# EAGLE board substep_motor_driver (EAGLE 6.5.0)
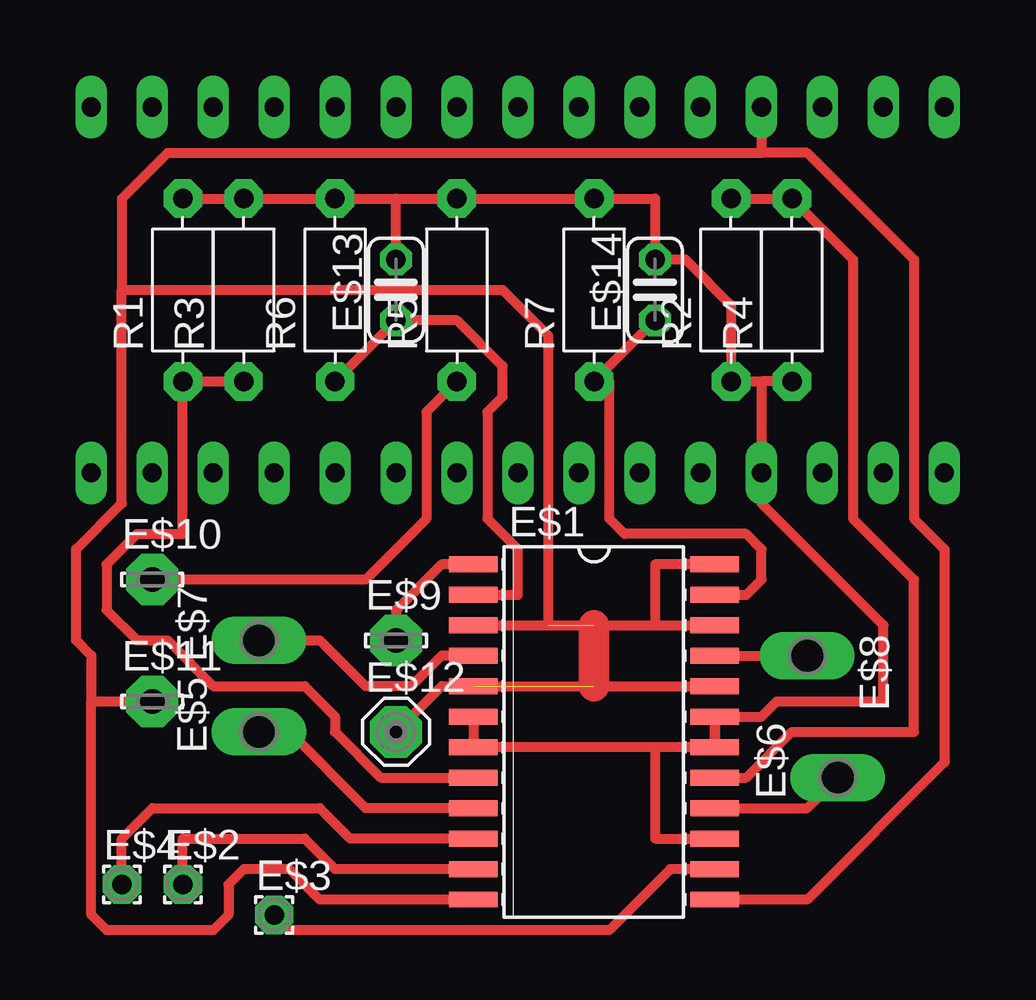
[diagram p0: board, top side]
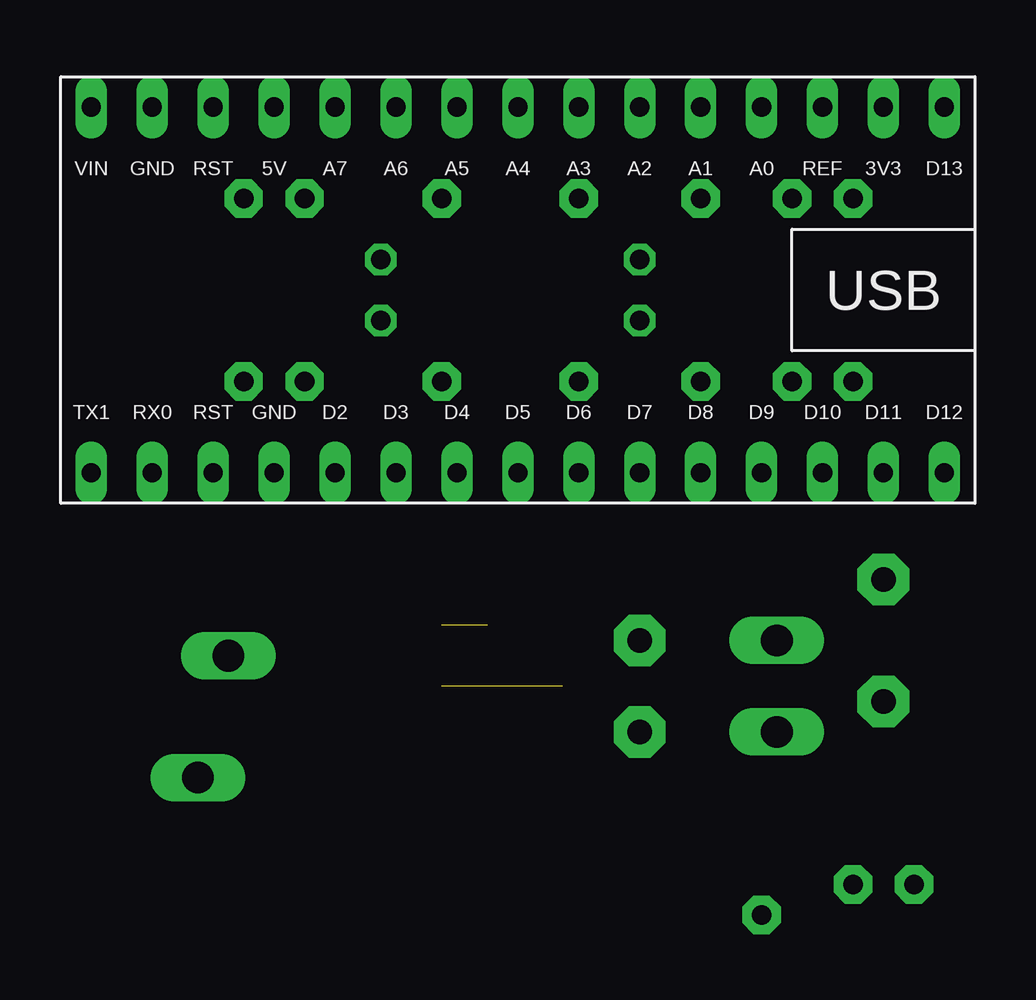
[diagram p1: board, bottom side, seen from below]

No outline drawn. Coordinates in mm, seen from the top.
Copper layers (1*16): Top 0.035mm / dielectric 1.5mm / Bottom 0.035mm
Design rules "default": minimum track width 10mil, minimum drill 24mil, track to track 8mil, track to pad 8mil, pad to pad 8mil, via to via 8mil, smd to smd 8mil, copper to edge 40mil, drill to drill 8mil, minimum pad ring 10mil, minimum via ring 8mil, stop-mask expansion 4mil, vias tented up to drill 0mil, thermal gap 10mil

## Footprints (pad centres in the part's own frame; a part is rotated, then mirrored left to right if it is on the bottom)
SO24R = smd 0.66 x 2.032: 1 -6.985,-5.029; 2 -5.715,-5.029; 3 -4.445,-5.029; 4 -3.175,-5.029; 5 -1.905,-5.029; 6 -0.635,-5.029; 7 0.635,-5.029; 8 1.905,-5.029; 9 3.175,-5.029; 10 4.445,-5.029; 11 5.715,-5.029; 12 6.985,-5.029; 13 6.985,5.029; 14 5.715,5.029; 15 4.445,5.029; 16 3.175,5.029; 17 1.905,5.029; 18 0.635,5.029; 19 -0.635,5.029; 20 -1.905,5.029; 21 -3.175,5.029; 22 -4.445,5.029; 23 -5.715,5.029; 24 -6.985,5.029
1,6/0,8 = drill 0.813 pad 1.6 octagon: 1 0,0
P1-13Y = drill 1.321 pad 1.905 long: TP 0,0
LSP10 = drill 1.016 pad 2.159 octagon: MP 0,0
MCS10B = drill 1.016 pad 2.159 octagon: MP 0,0
C025-024X044 = drill 0.813 octagon: 1 -1.27,0; 2 1.27,0
ARDUINO_NANO = drill 0.8 long: P$1 0,7.62; P$2 -2.54,7.62; P$3 -5.08,7.62; P$4 -7.62,7.62; P$5 -10.16,7.62; P$6 -12.7,7.62; P$7 -15.24,7.62; P$8 -17.78,7.62; P$9 2.54,7.62; P$10 5.08,7.62; P$11 7.62,7.62; P$12 10.16,7.62; P$13 12.7,7.62; P$14 15.24,7.62; P$15 17.78,7.62; P$16 -17.78,-7.62; P$17 -15.24,-7.62; P$18 -12.7,-7.62; P$19 -10.16,-7.62; P$20 -7.62,-7.62; P$21 -5.08,-7.62; P$22 -2.54,-7.62; P$23 0,-7.62; P$24 2.54,-7.62; P$25 5.08,-7.62; P$26 7.62,-7.62; P$27 10.16,-7.62; P$28 12.7,-7.62; P$29 15.24,-7.62; P$30 17.78,-7.62
R-7,5 = drill 0.813 pad 1.6 octagon: 1 -3.81,0; 2 3.81,0

## Placement (x,y rotation side)
E$1  [SO24R]  22.23,8.89 270 top
E$2  [1,6/0,8]  5.08,2.54 0 top
E$3  [1,6/0,8]  8.89,1.27 0 top
E$4  [1,6/0,8]  2.54,2.54 0 top
E$5  [P1-13Y]  8.26,8.89 90 top
E$6  [P1-13Y]  32.38,6.99 90 top
E$7  [P1-13Y]  8.26,12.7 90 top
E$8  [P1-13Y]  31.11,12.06 270 top
E$9  [LSP10]  13.97,12.7 0 top
E$10  [LSP10]  3.81,15.24 0 top
E$11  [LSP10]  3.81,10.16 0 top
E$12  [MCS10B]  13.97,8.89 0 top
E$13  [C025-024X044]  13.97,27.3 90 top
E$14  [C025-024X044]  24.77,27.3 90 top
E$15  [ARDUINO_NANO]  19.05,27.3 180 bottom
R1  1.2  [R-7,5]  5.08,27.3 90 top
R2  1.2  [R-7,5]  27.94,27.3 90 top
R3  1.2  [R-7,5]  7.62,27.3 90 top
R4  1.2  [R-7,5]  30.48,27.3 90 top
R5  1.2  [R-7,5]  16.51,27.3 90 top
R6  1.2  [R-7,5]  11.43,27.3 90 top
R7  1.2  [R-7,5]  22.23,27.3 90 top

## Library data of the parts
E$1 = analog-devices
E$2-E$4 = wirepad
E$5-E$8 = testpad
E$9-E$12 = solpad
E$13 E$14 = rcl
E$15 = eagle_llibrary
R1-R7 = discrete

## Nets
S$1: E$1.3 E$1.5 E$1.12 E$1.13 E$1.20 E$1.22 E$1.24 E$11.MP E$12.MP
S$2: E$1.10 E$4.1
S$3: E$1.1 E$9.MP
S$5: E$1.6 E$1.7 E$1.15 E$1.18 E$1.19 E$13.2 E$14.2 R1.2 R2.1 R3.2 R4.1 R5.2 R6.2 R7.2
S$6: E$1.8 R1.1 R3.1
S$7: E$1.17 R2.2 R4.2
S$8: E$1.11 E$2.1
S$9: E$1.9 E$5.TP
S$10: E$1.16 E$6.TP
S$11: E$1.4 E$7.TP
S$12: E$1.21 E$8.TP
S$13: E$1.2 E$13.1 R6.1
S$14: E$1.23 E$14.1 R7.1
S$15: E$10.MP R5.1
S$17: E$1.14 E$3.1

## Tracks (layer width: path | path; a pad name or v marks a point on that pad's centre or on a via)
S$1  (2 unrouted)
  Top 0.406: E$1.13 31.11,1.91 36.83,7.62 36.83,16.51 35.56,17.78 35.56,28.57 31.11,33.02 29.21,33.02 | 29.21,34.92 29.21,33.02 | 29.21,33.02 4.45,33.02 2.54,31.11 2.54,27.3 | 2.54,27.3 18.41,27.3 20.32,25.4 20.32,13.34 | 2.54,27.3 2.54,18.41 0.64,16.51 0.64,12.7 1.27,12.06 1.27,10.16 | 1.27,10.16 E$11.MP | E$1.12 10.79,1.91 9.53,3.17 7.62,3.17 6.99,2.54 6.99,1.27 6.35,0.64 1.91,0.64 1.27,1.27 1.27,10.16 | E$1.24 24.77,15.88 24.77,13.34 | 24.77,13.34 E$1.22 | E$1.3 20.32,13.34 | 20.32,13.34 22.23,13.34 24.77,13.34 | E$12.MP 15.88,10.79 E$1.5 22.23,10.79 E$1.20
  Top 1.27: 22.23,13.34 22.23,10.79
S$2
  Top 0.406: E$1.10 12.06,4.45 10.79,5.71 3.81,5.71 2.54,4.45 E$4.1
S$3
  Top 0.406: E$1.1 15.88,15.88 13.97,13.97 E$9.MP
S$5
  Top 0.406: E$1.6 E$1.7 24.77,8.26 | 24.77,8.26 24.77,4.45 E$1.15 | 10.79,31.11 R6.2 | R6.2 13.97,31.11 | E$13.2 13.97,31.11 | 13.97,31.11 R5.2 R7.2 24.77,31.11 E$14.2 26.04,28.57 27.94,26.67 R2.1 29.21,23.5 | R6.2 R3.2 R1.2 | R4.1 29.21,23.5 | 29.21,23.5 29.21,18.41 34.29,13.34 34.29,10.16 29.84,10.16 29.21,9.53 27.3,9.53 | E$1.18 27.3,9.53 | E$1.19 E$1.18 | E$1.18 27.25,9.58 27.3,9.53 | E$1.18 24.77,8.26
S$6
  Top 0.406: R3.1 R1.1 5.08,17.14 3.17,17.14 1.91,15.88 1.91,13.97 3.17,12.7 4.45,12.7 6.35,10.79 10.16,10.79 11.43,9.53 11.43,8.89 13.34,6.99 E$1.8
S$7
  Top 0.406: R2.2 R4.2 33.02,28.57 33.02,17.78 35.56,15.24 35.56,8.89 30.48,8.89 28.57,6.99 E$1.17
S$8
  Top 0.406: E$1.11 11.43,3.17 10.16,4.45 5.08,4.45 E$2.1
S$9
  Top 0.406: E$1.9 12.7,5.71 9.53,8.89 E$5.TP
S$10
  Top 0.406: E$1.16 31.11,5.71 E$6.TP
S$11
  Top 0.406: E$7.TP 10.79,12.7 12.7,10.79 14.61,10.79 15.88,12.06 E$1.4
S$12
  Top 0.406: E$1.21 E$8.TP
S$13
  Top 0.406: R6.1 E$13.1 16.51,26.04 18.41,24.13 18.41,22.86 17.78,22.23 17.78,17.78 19.05,16.51 19.05,14.61 E$1.2
S$14
  Top 0.406: E$1.23 28.57,14.61 29.21,15.24 29.21,16.51 28.57,17.14 23.5,17.14 22.86,17.78 22.86,23.5 R7.1 E$14.1
S$15
  Top 0.406: R5.1 15.24,22.23 15.24,17.78 12.7,15.24 E$10.MP
S$17
  Top 0.406: E$1.14 25.4,3.17 22.86,0.64 9.53,0.64 E$3.1